# EAGLE board components (EAGLE 9.3.1)

Size 160 x 100 mm. Coordinates in mm from the lower left corner, seen from the top.
Outline: 0,0 160,0 160,100 0,100 0,0
Copper layers (1*16): Top 0.035mm / dielectric 1.5mm / Bottom 0.035mm
Design rules "default": minimum track width 6mil, minimum drill 0.35mm, track to track 6mil, track to pad 6mil, pad to pad 6mil, via to via 6mil, smd to smd 6mil, copper to edge 40mil, drill to drill 6mil, minimum pad ring 10mil, minimum via ring 8mil, stop-mask expansion 4mil, vias tented up to drill 0mil, thermal gap 10mil

## Footprints (pad centres in the part's own frame; a part is rotated, then mirrored left to right if it is on the bottom)
IRL80A = drill 0.813 octagon: A 0,-1.27; K 0,1.27
DIL16 = drill 0.813 long: 1 -8.89,-3.81; 2 -6.35,-3.81; 3 -3.81,-3.81; 4 -1.27,-3.81; 5 1.27,-3.81; 6 3.81,-3.81; 7 6.35,-3.81; 8 8.89,-3.81; 9 8.89,3.81; 10 6.35,3.81; 11 3.81,3.81; 12 1.27,3.81; 13 -1.27,3.81; 14 -3.81,3.81; 15 -6.35,3.81; 16 -8.89,3.81
SWITCH_SPDT_PTH_11.6X4.0MM = drill 1.016 pad 1.88: 1 0,2.54; 2 0,0; 3 0,-2.54
HSC_PRESSURE = drill 0.6 square: GND 1.27,-8.89; SCL 8.89,-8.89; SDA 6.35,-8.89; VCC 3.81,-8.89
0204/7 = drill 0.813 pad 1.676 octagon: 1 -3.81,0; 2 3.81,0
VMA320 = drill 0.6 square: GND 10.16,-5.08; S 5.08,-5.08; VCC 7.62,-5.08
BOARD = drill 0.6 square: 0/RX 1.27,-40.64; 1/TX 1.27,-43.18; 3V 1.27,-10.16; 5 21.59,-40.64; 5V 21.59,-22.86; 6 21.59,-38.1; 9/A7 21.59,-35.56; 10 21.59,-33.02; 11 21.59,-30.48; 12 21.59,-27.94; 13 21.59,-25.4; 14/A0 1.27,-17.78; 15/A1 1.27,-20.32; 16/A2 1.27,-22.86; 17/A3 1.27,-25.4; 18/A4 1.27,-27.94; 19/A5 1.27,-30.48; 20/SDA 21.59,-45.72; 21/SCL 21.59,-43.18; 22/MISO 1.27,-38.1; 23/MOSI 1.27,-35.56; 24/SCK 1.27,-33.02; AREF 1.27,-12.7; EN 21.59,-20.32; GND 1.27,-15.24; GND1 1.27,-45.72; RST 1.27,-7.62; VBAT 21.59,-17.78
GPS_BREAKOUT = drill 0.6 square: GND 3.81,-1.27; RX 11.43,-1.27; RXD 16.51,-1.27; TX 13.97,-1.27; TXD 8.89,-1.27; VCC 6.35,-1.27

## Placement (x,y rotation side)
GPS  [IRL80A]  -55.88,67.31 0 top  (outside the outline)
IC1  L293D  [DIL16]  -24.13,69.85 0 top  (outside the outline)
LIMIT_FRONT_L  [SWITCH_SPDT_PTH_11.6X4.0MM]  -52.07,6.35 0 top  (outside the outline)
LIMIT_FRONT_L1  [SWITCH_SPDT_PTH_11.6X4.0MM]  -58.42,6.35 0 top  (outside the outline)
LIMIT_FRONT_R  [SWITCH_SPDT_PTH_11.6X4.0MM]  -15.24,58.42 0 top  (outside the outline)
LIMIT_FRONT_R1  [SWITCH_SPDT_PTH_11.6X4.0MM]  -21.59,58.42 0 top  (outside the outline)
LIMIT_REAR_L  [SWITCH_SPDT_PTH_11.6X4.0MM]  -27.94,58.42 0 top  (outside the outline)
LIMIT_REAR_L1  [SWITCH_SPDT_PTH_11.6X4.0MM]  -34.29,58.42 0 top  (outside the outline)
LIMIT_REAR_R  [SWITCH_SPDT_PTH_11.6X4.0MM]  -40.64,58.42 0 top  (outside the outline)
LIMIT_REAR_R1  [SWITCH_SPDT_PTH_11.6X4.0MM]  -46.99,58.42 0 top  (outside the outline)
PRESSURE_1  PRESSURE  [HSC_PRESSURE]  -110.49,-50.8 0 top  (outside the outline)
R2  4k7 Ω  [0204/7]  -17.78,77.47 0 top  (outside the outline)
R3  4k7 Ω  [0204/7]  -27.94,77.47 0 top  (outside the outline)
R4  4k7 Ω  [0204/7]  -38.1,77.47 0 top  (outside the outline)
R6  1 kΩ  [0204/7]  -48.26,77.47 0 top  (outside the outline)
R7  1 kΩ  [0204/7]  -58.42,77.47 0 top  (outside the outline)
SD  [IRL80A]  -62.23,67.31 0 top  (outside the outline)
SENSORS  [IRL80A]  -48.26,67.31 0 top  (outside the outline)
TEMP_1  VMA320  [VMA320]  -99.06,-54.61 0 top  (outside the outline)
TEMP_2  VMA320  [VMA320]  -99.06,-36.83 0 top  (outside the outline)
TEMP_3  VMA320  [VMA320]  -99.06,-45.72 0 top  (outside the outline)
U$1  ADALOGGER_M0  [BOARD]  -87.63,16.51 0 top  (outside the outline)
U$3  GPS  [GPS_BREAKOUT]  22.86,10.16 0 top

## Library data of the parts
GPS R2-R4 R6 R7 SENSORS = adafruit
IC1 = st-microelectronics; MPN: L293D; OC_FARNELL: 9589619; OC_NEWARK: 56P8249
LIMIT_FRONT_L LIMIT_FRONT_L1 LIMIT_FRONT_R LIMIT_FRONT_R1 LIMIT_REAR_L LIMIT_REAR_L1 LIMIT_REAR_R LIMIT_REAR_R1 = SparkFun-Switches; PROD_ID: SWCH-08261; SF_SKU: COM-00102
PRESSURE_1 TEMP_1-TEMP_3 U$1 U$3 = Adalogger_32u4
SD = adafruit; SPICEPREFIX: B

## Nets
3.3V: PRESSURE_1.VCC R6.1 R7.1 TEMP_1.VCC TEMP_2.VCC TEMP_3.VCC U$1.3V U$3.VCC
5V: IC1.1 IC1.8 IC1.16 U$1.5V
GND: IC1.5 LIMIT_FRONT_L1.3 LIMIT_FRONT_L.3 LIMIT_FRONT_R1.3 LIMIT_FRONT_R.3 LIMIT_REAR_L1.3 LIMIT_REAR_L.3 LIMIT_REAR_R1.3 LIMIT_REAR_R.3 PRESSURE_1.GND U$1.GND1 U$3.GND
GND1: IC1.4
GND3: IC1.13
GND4: IC1.12
N$1: IC1.11
N$2: TEMP_1.GND TEMP_2.GND TEMP_3.GND U$1.GND
N$3: U$1.0/RX U$3.TXD
N$4: TEMP_2.S U$1.14/A0
N$5: U$1.1/TX U$3.RXD
N$6: IC1.2 U$1.10
N$7: PRESSURE_1.SDA R6.2 U$1.20/SDA
N$8: PRESSURE_1.SCL R7.2 U$1.21/SCL
N$9: TEMP_1.S U$1.16/A2
N$10: R4.2 SENSORS.A
N$11: GPS.A R3.2
N$12: R2.2 SD.A
N$15: IC1.7 U$1.9/A7
N$16: LIMIT_REAR_L.2 LIMIT_REAR_R.2 U$1.5
N$17: IC1.14
N$18: TEMP_3.S U$1.15/A1
N$21: IC1.3
N$22: IC1.6
N$23: IC1.10 U$1.12
N$24: GPS.K SD.K SENSORS.K
N$25: IC1.15 U$1.13
N$26: LIMIT_FRONT_L1.2 LIMIT_FRONT_R1.2 U$1.11
N$27: R4.1 U$1.22/MISO
N$28: LIMIT_REAR_L1.2 LIMIT_REAR_R1.2 U$1.19/A5
N$30: LIMIT_FRONT_L.2 LIMIT_FRONT_R.2 U$1.6
N$31: R3.1 U$1.23/MOSI
N$32: R2.1 U$1.24/SCK

## Tracks (layer width: path | path; a pad name or v marks a point on that pad's centre or on a via)
3.3V  (7 unrouted)
5V  (3 unrouted)
GND  (11 unrouted)
N$2  (3 unrouted)
N$3  (1 unrouted)
N$4  (1 unrouted)
N$5  (1 unrouted)
N$6  (1 unrouted)
N$7  (2 unrouted)
N$8  (2 unrouted)
N$9  (1 unrouted)
N$10  (1 unrouted)
N$11  (1 unrouted)
N$12  (1 unrouted)
N$15  (1 unrouted)
N$16  (2 unrouted)
N$18  (1 unrouted)
N$23  (1 unrouted)
N$24  (2 unrouted)
N$25  (1 unrouted)
N$26  (2 unrouted)
N$27  (1 unrouted)
N$28  (2 unrouted)
N$30  (2 unrouted)
N$31  (1 unrouted)
N$32  (1 unrouted)